# Altium PCB PCB3.PcbDoc
Units mm, origin at the board's own origin, x right, y up, seen from the top; angles counter-clockwise.
Board outline 98.04 x 87.25 mm, 2 copper layers (Top Layer, Bottom Layer); 45 components, 29 nets, 130 pads, 0 vias.
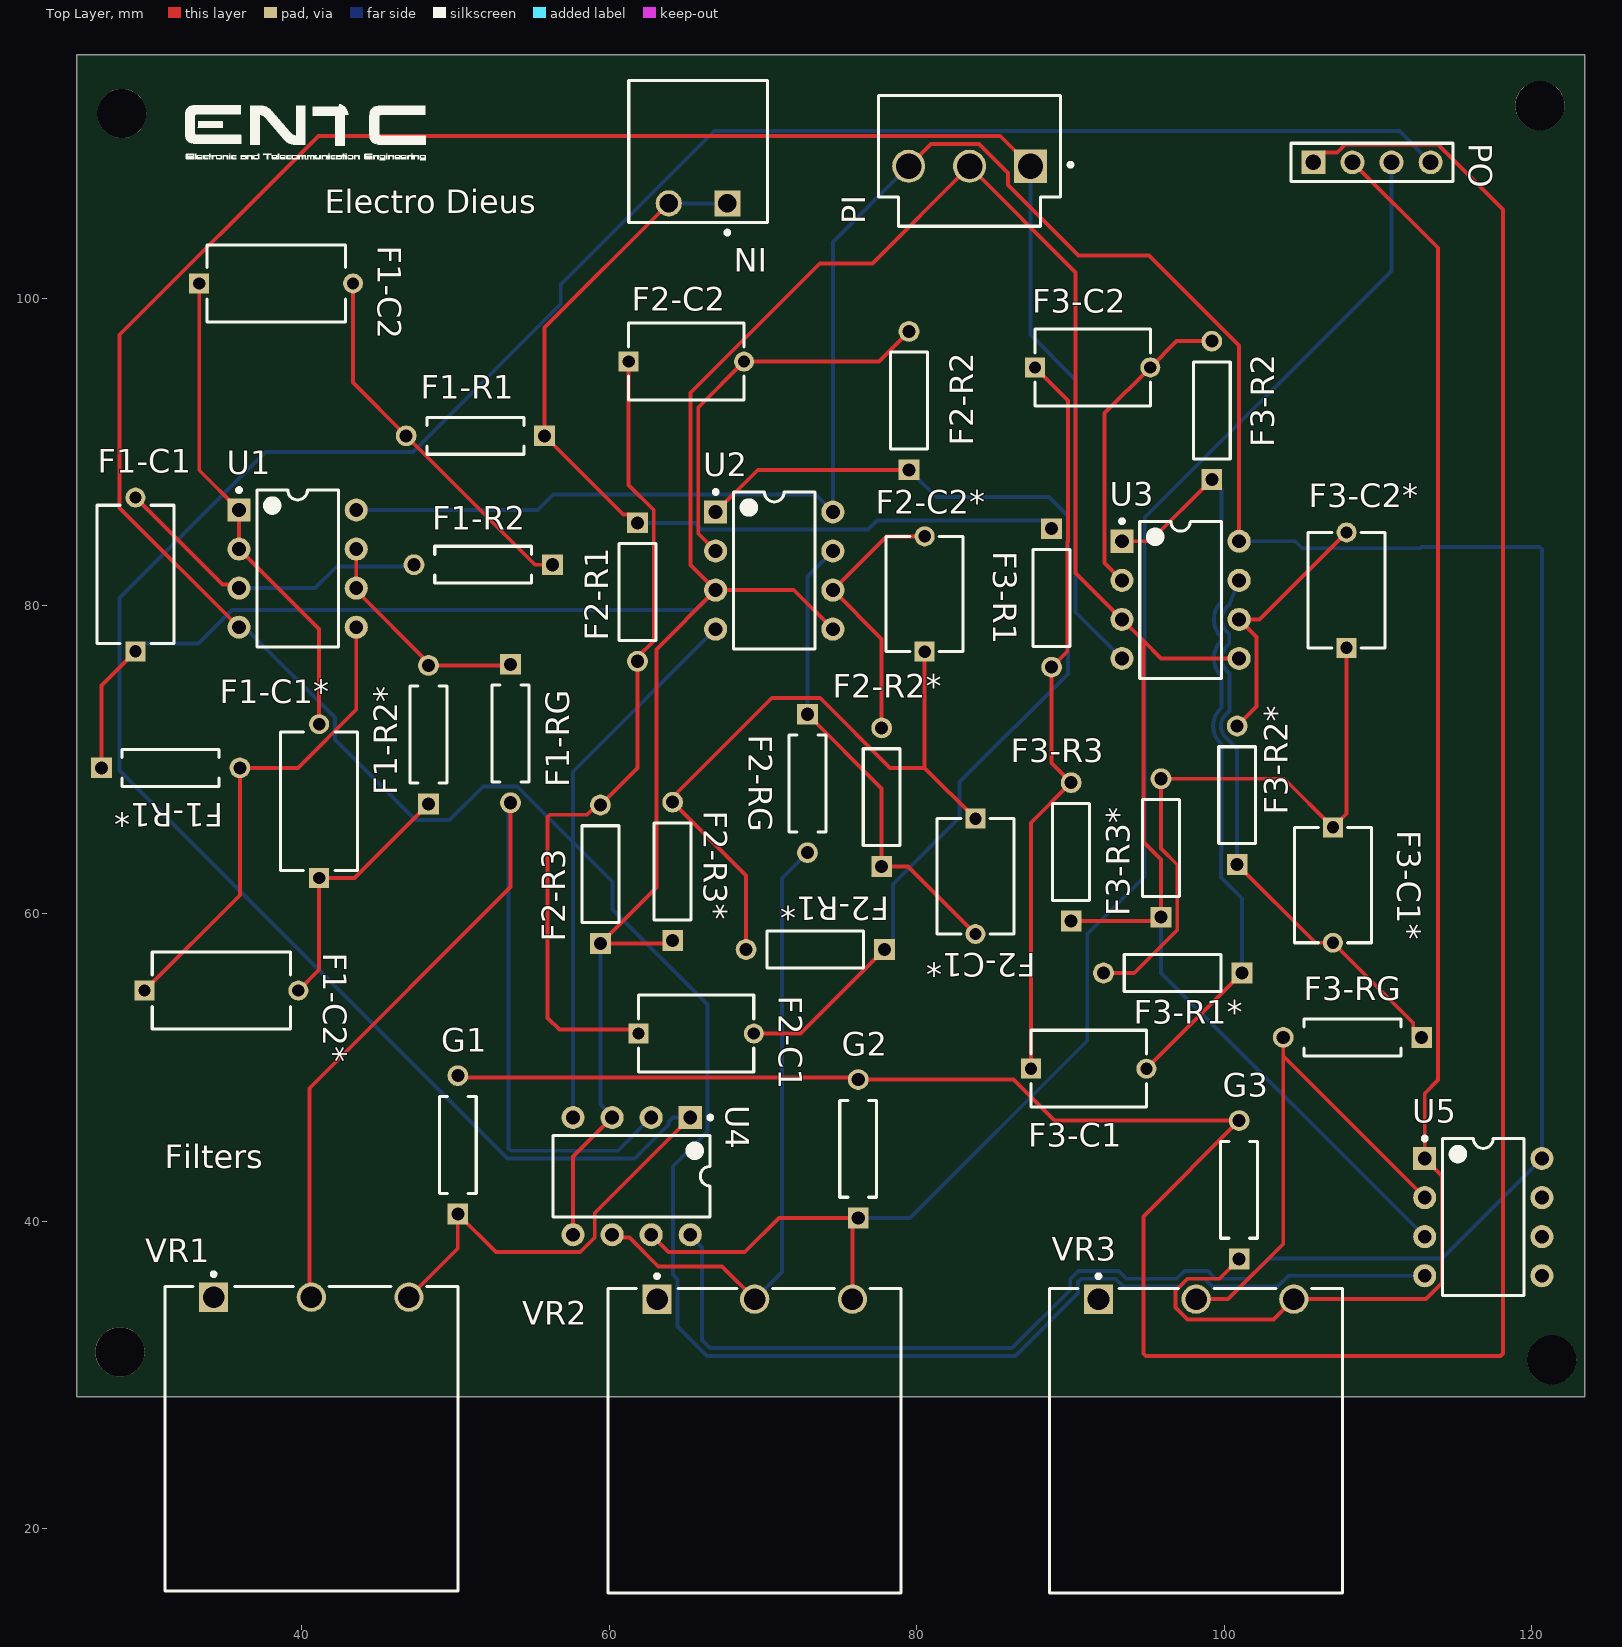
[diagram p0: Top Layer view]
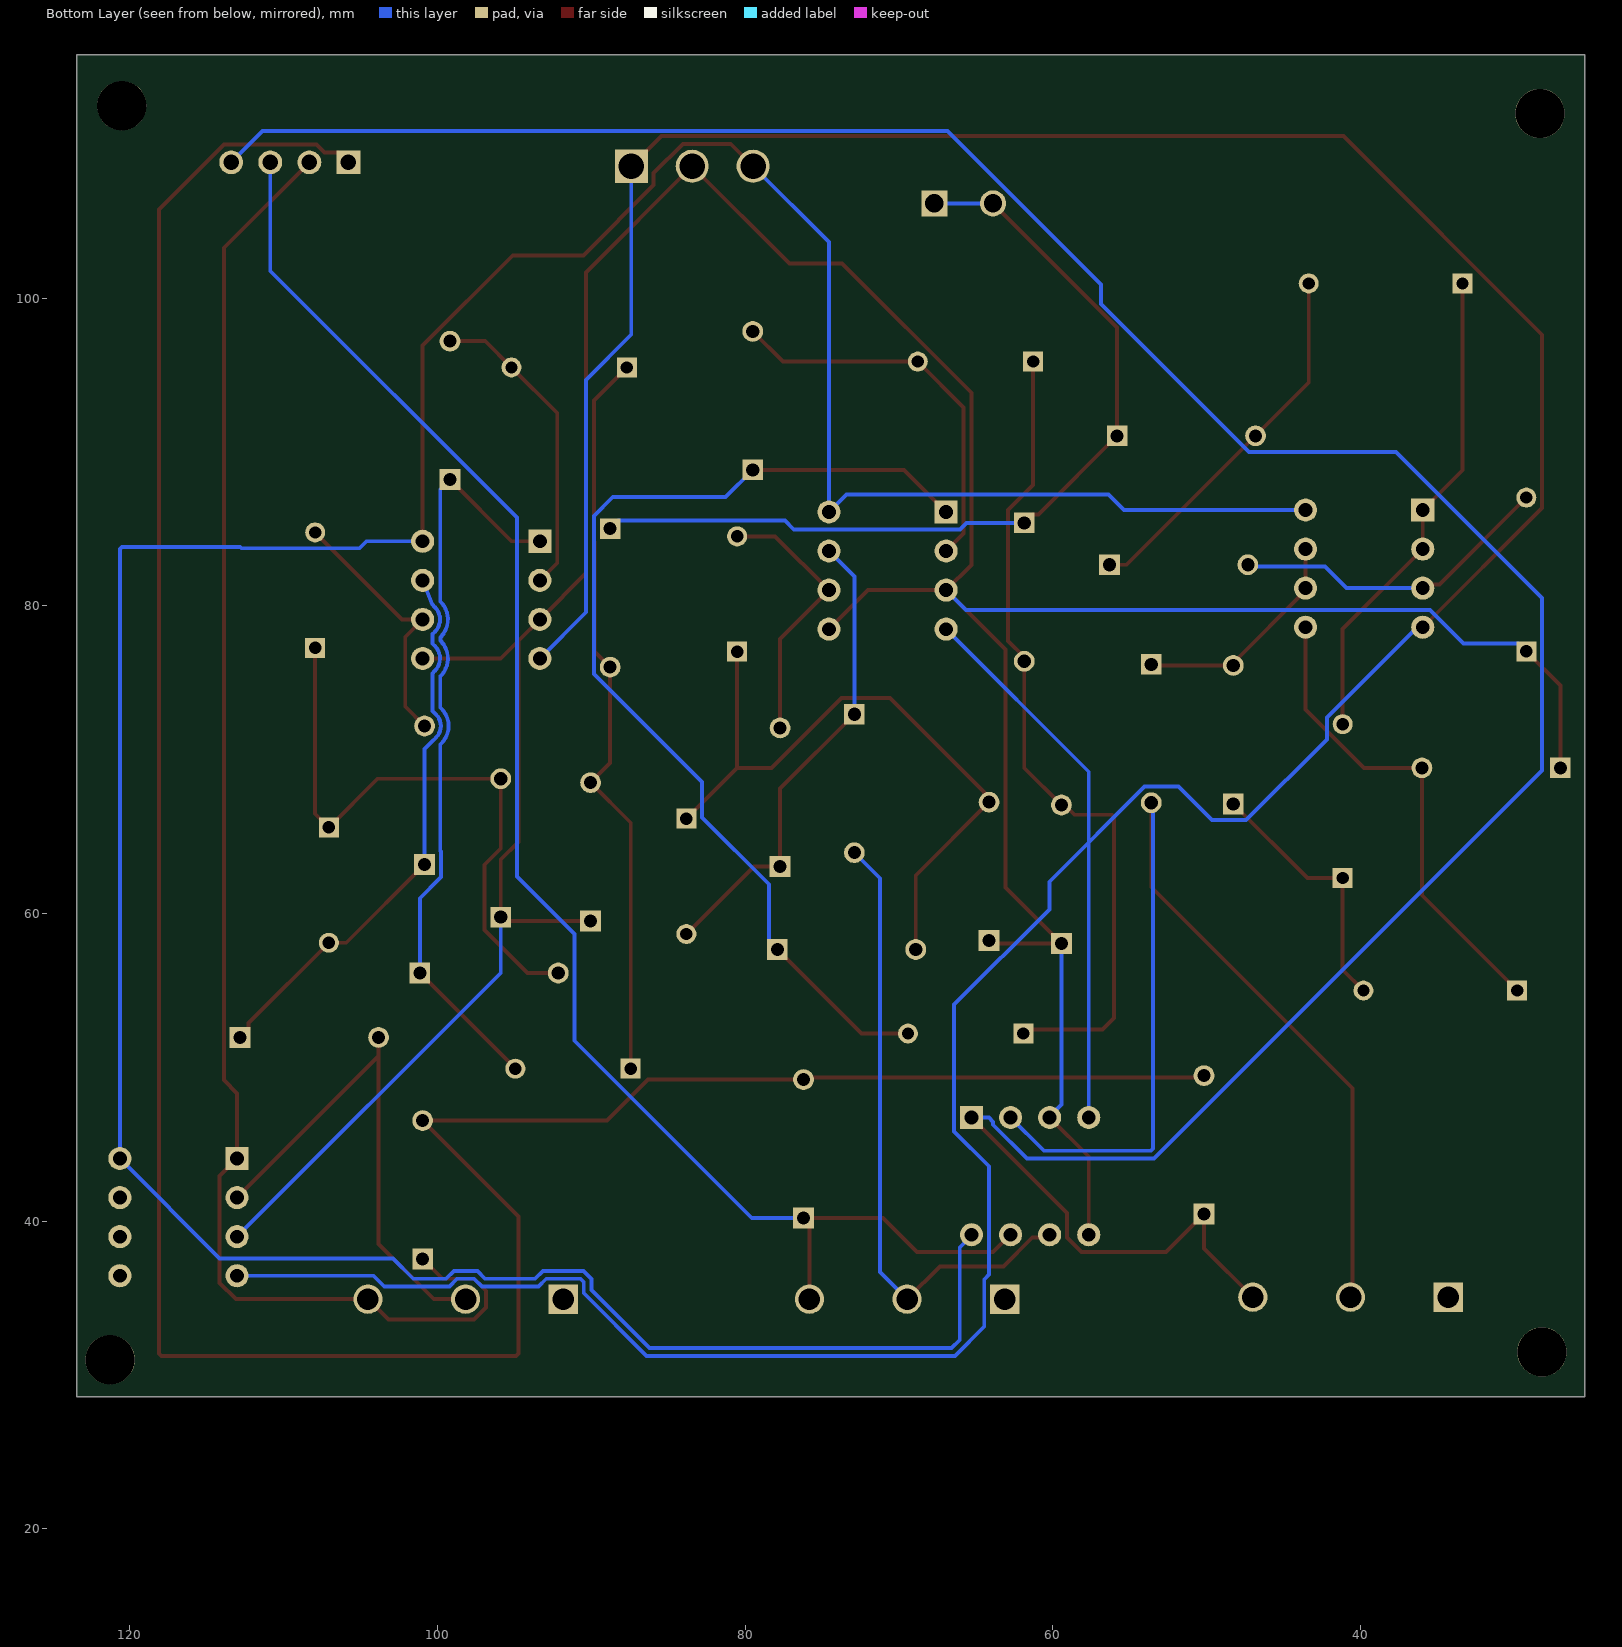
[diagram p1: Bottom Layer view, seen from below]

## Layer stack, top to bottom
Top Solder: solder mask 0.0102, Solder Resist, Dk 3.5
Top Layer: signal copper 0.0356
Dielectric 1: dielectric 0.32, FR-4, Dk 4.8
Bottom Layer: signal copper 0.0356
Bottom Solder: solder mask 0.0102, Solder Resist, Dk 3.5

## Board outline
25.4,28.575 123.444,28.575 123.444,115.824 25.4,115.824

## Design rules (kind name [scope] priority, off if disabled: settings)
Clearance [All] p1: gap=0.254 ignorepadtopadclearanceinfootprint=FALSE
HoleSize [All] p1: absolutevalues=TRUE maxlimit=4 minlimit=0.025 maxpercent=80.000 minpercent=20.000
PolygonConnect [All] p1: connectstyle=Relief reliefconductorwidth=0.254 reliefentries=4 polygonreliefangle="90 Angle" airgapwidth=0.254
RoutingVias [All] p1: holewidth=0.711 width=1.27 viastyle="Through Hole" minholewidth=0.711 minwidth=1.27 maxholewidth=0.711 maxwidth=1.27
SilkToSilkClearance [All] p1: silktosilkclearance=0.1
SilkToSolderMaskClearance [IsPad] p1: minsilkscreentomaskgap=0.1 clearancetoexposedcopper=TRUE
SolderMaskExpansion [All] p1: expansion=0.102 istentingtop=FALSE
SupplyNets "Schematic Supply Nets_2" [InNet('GND')] p1: voltage=0.000
SupplyNets "Schematic Supply Nets_1" [InNet('-12')] p2: voltage=0.000
SupplyNets "Schematic Supply Nets" [InNet('+12')] p3: voltage=0.000
Width [All] p1: maxlimit=0.254 minlimit=0.254 preferedwidth=0.254
27 further rules are at their usual default settings.

## Components (designator, comment, footprint, x,y, rotation, side; value= is the part's Value field where it differs from the comment)
F1-C1 "VY1102M35Y5UQ6TV0" FP-VY1102M35Y5UQ6TV0-MFG 29.21,82.042 r90 top
F1-C1* "VY1102M35Y5UQ6TV0" FP-VY1102M35Y5UQ6TV0-MFG 41.148,67.31 r90 top
F1-C2 "VY1102M35Y5UQ6TV0" FP-VY1102M35Y5UQ6TV0-MFG 38.354,100.965 r0 top
F1-C2* "VY1102M35Y5UQ6TV0" FP-VY1102M35Y5UQ6TV0-MFG 34.798,54.991 r0 top
F1-R1 "MFR-25FBF52-2K21" RESA60-630X240 51.308,91.059 r180 top value=2.21k
F1-R1* "MFR-25FBF52-2K21" RESA60-630X240 31.496,69.469 r0 top value=2.21k
F1-R2 "MFR-25FBF52-2K21" RESA60-630X240 51.816,82.677 r180 top value=2.21k (schematic designator F-R2)
F1-R2* "MFR-25FBF52-2K21" RESA60-630X240 48.26,71.628 r90 top value=2.21k
F1-RG "MFR-25FBF52-2K21" RESA60-630X240 53.594,71.7 r270 top value=2.21k
F2-C1 "VY2102M29Y5US6TV7" FP-VY2102M29Y5US6TV7-MFG 65.659,52.197 r0 top
F2-C1* "VY2102M29Y5US6TV7" FP-VY2102M29Y5US6TV7-MFG 83.82,62.417 r270 top
F2-C2 "VY2102M29Y5US6TV7" FP-VY2102M29Y5US6TV7-MFG 65.024,95.885 r0 top
F2-C2* "VY2102M29Y5US6TV7" FP-VY2102M29Y5US6TV7-MFG 80.518,80.772 r90 top
F2-R1 "MFR-25FBF52-2K21" RESA60-630X240 61.849,80.899 r270 top
F2-R1* "MFR-25FBF52-2K21" RESA60-630X240 73.406,57.658 r180 top
F2-R2 "MFR-25FBF5210K" RESA60-630X240 79.502,93.345 r90 top
F2-R2* "MFR-25FBF5210K" RESA60-630X240 77.724,67.564 r90 top
F2-R3 "MFR-25FBF5210K" RESA60-630X240 59.436,62.556 r90 top
F2-R3* "MFR-25FBF5210K" RESA60-630X240 64.135,62.738 r90 top
F2-RG "MFR-25FBF52-2K21" RESA60-630X240 72.898,68.453 r270 top value=2.21k
F3-C1 "VY2102M29Y5US6TV7" FP-VY2102M29Y5US6TV7-MFG 91.186,49.911 r0 top
F3-C1* "VY2102M29Y5US6TV7" FP-VY2102M29Y5US6TV7-MFG 107.061,61.849 r270 top
F3-C2 "VY2102M29Y5US6TV7" FP-VY2102M29Y5US6TV7-MFG 91.44,95.504 r0 top
F3-C2* "VY2102M29Y5US6TV7" FP-VY2102M29Y5US6TV7-MFG 107.95,81.026 r90 top
F3-R1 "MFR-25FBF52-2K21" RESA60-630X240 88.773,80.518 r270 top
F3-R1* "MFR-25FBF52-2K21" RESA60-630X240 96.647,56.134 r180 top
F3-R2 "MFR-25FBF5210K" RESA60-630X240 99.187,92.71 r90 top
F3-R2* "MFR-25FBF5210K" RESA60-630X240 100.838,67.691 r90 top
F3-R3 "MFR-25FBF5210K" RESA60-630X240 90.043,64.008 r90 top
F3-R3* "MFR-25FBF5210K" RESA60-630X240 95.885,64.262 r90 top
F3-RG "MFR-25FBF52-2K21" RESA60-630X240 108.331,51.943 r180 top value=2.21k
G1 "MFR-25FBF52-2K21" RESA60-630X240 50.165,44.958 r90 top value=2.21k
G2 "MFR-25FBF52-2K21" RESA60-630X240 76.2,44.704 r90 top value=2.21k
G3 "MFR-25FBF52-2K21" RESA60-630X240 100.965,42.037 r90 top value=2.21k
IN "1803277" PHOE-1803277_V 65.786,106.172 r180 top (schematic designator P1)
PI "B3P-VH(LF)(SN)" JST-B3P-VH(LF)(SN)-3_V 83.439,109.835 r180 top
PO "HMTSW-104-23-F-S-237" SMTC-HMTSW-104-23-X-S-237 105.791,108.839 r0 top
U1 "NE5532P" P0008A 39.751,82.423 r0 top
U2 "NE5532PE4" TI-P8 70.739,82.296 r0 top
U3 "NE5532PE4" TI-P8 97.155,80.391 r0 top
U4 "NE5532P" P0008A 61.468,42.926 r270 top
U5 "NE5532P" P0008A 116.84,40.259 r0 top
VR1 "3852A-282-103AL" BOUR-3852A-282-103AL-3_V 40.64,35.052 r0 top
VR2 "3852A-282-103AL" BOUR-3852A-282-103AL-3_V 69.469,34.925 r0 top
VR3 "3852A-282-103AL" BOUR-3852A-282-103AL-3_V 98.171,34.925 r0 top

## Footprints (in the part's own frame and the unit in brackets; to place one, negate y for a bottom-side part, rotate by r counter-clockwise, add the part's x,y. Pads: shape width x height; smd on the part's side, far side on the other; paste and mask are expansions set on the pad)
BOUR-3852A-282-103AL-3_V [mm] "TH, 3-Leads, Body 19.81x19.05mm, Pitch 6.35mm"
  rect 1.9x1.9 hole 1.4: 1(-6.35,0)
  round 1.9 hole 1.4: 2(0,0) 3(6.35,0)
  silkscreen extent -9.53,-19.11 9.53,1.62, body extent -9.52,-19.11 9.52,0.7, height 19.05
FP-VY1102M35Y5UQ6TV0-MFG [mm]
  rect 1.3x1.3 hole 0.8 paste-2539.97 mask+0: 1(-5,0)
  round 1.3 hole 0.8 paste-2539.97 mask+0: 2(5,0)
  silkscreen extent -4.5,-2.5 4.5,2.5, body extent -5.75,-2.6 5.75,2.6, height 0.25
FP-VY2102M29Y5US6TV7-MFG [mm]
  rect 1.3x1.3 hole 0.8 paste-2539.97 mask+0: 1(-3.75,0)
  round 1.3 hole 0.8 paste-2539.97 mask+0: 2(3.75,0)
  silkscreen extent -3.75,-2.5 3.75,2.5, body extent -4.5,-2.6 4.5,2.6, height 0.25
JST-B3P-VH(LF)(SN)-3_V [mm] "Connector, 3-Leads, Body 8.5x11.82mm, Pitch 3.96mm"
  rect 2.15x2.15 hole 1.65: 1(-3.96,1.25)
  round 2.15 hole 1.65: 2(0,1.25) 3(3.96,1.25)
  silkscreen extent -6.69,-3.35 5.91,5.15, body extent -5.91,-3.35 5.91,5.15, height 10.9
P0008A [mm] "DIP, 8-Leads, Body 10.15x6.6mm, Pitch 2.54mm"
  rect 1.5x1.5 hole 0.9: 1(-3.81,3.81)
  round 1.5 hole 0.9: 2(-3.81,1.27) 3(-3.81,-1.27) 4(-3.81,-3.81) 5(3.81,-3.81) 6(3.81,-1.27) 7(3.81,1.27) 8(3.81,3.81)
  silkscreen extent -3.93,-5.1 2.65,5.23, body extent -3.95,-5.07 3.95,5.07, height 5.08
PHOE-1803277_V [mm] "CONN, Body 9.2x9.01mm, Pitch 3.81mm"
  rect 1.7x1.7 hole 1.2: 1(-1.905,0)
  round 1.7 hole 1.2: 2(1.905,0)
  silkscreen extent -4.5,-8 4.5,2.02, body extent -4.51,-8 4.5,1.3, height 7.25
RESA60-630X240 [mm] "Axial Resistor, 2-Leads, Dia 2.4mm, Body Length 6.3mm"
  rect 1.35x1.35 hole 0.85: 1(-4.5,0)
  round 1.35 hole 0.85: 2(4.5,0)
  silkscreen extent -3.15,-1.2 3.15,1.2, body extent -4.77,-1.19 4.77,1.2, height 2.4
SMTC-HMTSW-104-23-X-S-237 [mm] "Terminal Strip, 1x2 Pins, Vertical, 2.54mm Pitch, Male"
  rect 1.55x1.55 hole 1.02: 1(0,0)
  round 1.55 hole 1.02: 2(2.54,0) 3(5.08,0) 4(7.62,0)
  silkscreen extent -1.46,-1.24 9.08,1.24, body extent -1.27,-1.27 8.89,1.27, height 8.56
TI-P8 [mm] "DIP, 8-Leads, Body 9.59x6.35mm, Pitch 2.54mm"
  rect 1.5x1.5 hole 0.9: 1(-3.81,3.81)
  round 1.5 hole 0.9: 2(-3.81,1.27) 3(-3.81,-1.27) 4(-3.81,-3.81) 5(3.81,-3.81) 6(3.81,-1.27) 7(3.81,1.27) 8(3.81,3.81)
  silkscreen extent -3.93,-5.1 2.65,5.23, body extent -3.95,-5.07 3.95,5.07, height 5.08

## Part data
F1-C1 F1-C1* F1-C2 F1-C2*: library part CMP-02417-000063-1, "CAP CER 1000PF 760VAC Y5U RADIAL", Capacitance=1nF, Case/Package=Radial, Dielectric=Y5U, Max Operating Temperature=125°C, Min Operating Temperature=-40°C, Package Quantity=500, Resistor Type=Ceramic, Tolerance=20%, Voltage=500V, Construction=RADIAL, Contact Plating=Tin, Depth=5mm, Diameter=9mm, Height=12mm, Height - Seated (Max)=0.512inch, Lead Diameter=0.6mm, Lead Pitch=10mm, Lead/Base Style=Kinked, Mount="Through Hole", Packaging="Tape and Reel", Radiation Hardening=No, RoHS Compliant=Yes, Series=VY1, Termination=Radial, Voltage Rating (AC)=500V, Voltage Rating (DC)=500V
F1-R1 F1-R1* F1-R2 F1-R2* F1-RG F2-RG F3-RG G1 G2 G3: library part CMP-009-00054-4, "Axial Resistor, 2.21 KOhm, +/- 1%, 0.25 W, -55 to 155 degC, 2-Pin THD, RoHS, Bulk", Case/Package=Axial, Manufacturer=Yageo, Max Operating Temperature=155°C, Min Operating Temperature=-55°C, Package Description="2-Pin Axial Lead, Dia 2.4 mm, Body Length 6.3 mm", Package Quantity=200, Package Reference=MFR-25, Power=250mW, Tolerance=1%, Voltage Rating=250V, Datasheet URL=http://www.yageo.com/documents/recent/Yageo%20LR_MFR_2013.pdf, Datasheet Version=Apr-13, Manufacturer URL=http://www.yageo.com/, Mounting Technology=TH, Packaging=Bulk, RoHS Compliant=True
F2-C1 F2-C1* F2-C2 F2-C2* F3-C1 F3-C1* F3-C2 F3-C2*: library part CMP-00030-42817980-1, "VY2102M29Y5US6TV7 Cap Ceramic Suppression X1/Y2 0.001uF 440VAC/300VAC Y5U 20% (7.5 X 5mm) Radial 7.5mm 125C T/R", Capacitance=1nF, Case/Package=Radial, Dielectric=Y5U, Max Operating Temperature=125°C, Min Operating Temperature=-40°C, Tolerance=20%, Voltage=300V, Voltage Rating=1kV, Composition=Ceramic, Depth=5mm, Diameter=7.5mm, Height=10.5mm, Height - Seated (Max)=11.5062mm, Lead Diameter=600µm, Lead Free="Lead Free", Lead Pitch=7.5mm, Lead/Base Style=Kinked, Material=Ceramic, Mount="Through Hole", NexarPartId=42817980, Packaging="Tape & Reel (TR)", Radiation Hardening=No, REACH SVHC=Unknown, RoHS=Compliant, Schedule B="8532230060, 8532230060", Termination=Radial, Voltage Rating (AC)=300V
F2-R1 F2-R1* F3-R1 F3-R1*: library part CMP-1659-00065-1, "Axial Resistor, 2.21 KOhm, +/- 1%, 0.25 W, -55 to 155 degC, 2-Pin THD, RoHS, Bulk", Case Code (Imperial)=0402, Case Code (Metric)=1005, Current Rating="300 mA", Max Operating Temperature="125 degC", Min Operating Temperature="-55 degC", Package Quantity=10000, Resistance="0.15 Ohm", Case\Package=0402, ComponentLink1Description="Manufacturer URL", ComponentLink1URL=http://www.yageo.com/, ComponentLink2Description=Datasheet, ComponentLink2URL=http://www.yageo.com/documents/recent/Yageo%20LR_MFR_2013.pdf, DatasheetVersion=Apr-13, Height="0.02 inch", Length="0.04 inch", Mount="Surface Mount", PackageDescription="2-Pin Axial Lead, Dia 2.4 mm, Body Length 6.3 mm", PackageReference=MFR-25, Packaging="Tape and Reel", Pins=2, Radiation Hardening=No, REACH SVHC="No SVHC", RoHSCompliant=true, Shielding=Unshielded, Width="0.02 inch"
F2-R2 F2-R2* F2-R3 F2-R3* F3-R2 F3-R2* F3-R3 F3-R3*: library part CMP-1659-00074-2, "Axial Resistor, 10 KOhm, +/- 1%, 0.25 W, -55 to 155 degC, 2-Pin THD, RoHS, Bulk", Case\/Package=Axial, Manufacturer=Yageo, Max Operating Temperature=155degC, Max Power Dissipation=250mW, Min Operating Temperature=-55degC, Package Description="2-Pin Axial Lead, Dia 2.4 mm, Body Length 6.3 mm", Package Quantity=200, Package Reference=MFR-25, Resistance=10KOhm, Temperature Coefficient=100ppm\/degreesC, Tolerance=1%, Voltage Rating=250V, Voltage Rating (DC)=200V, Composition=MetalFilm, Datasheet URL=http://www.yageo.com/documents/recent/Yageo%20LR_MFR_2013.pdf, Datasheet Version=04/2013, Lead Free=LeadFree, Length=0.248inch, Manufacturer URL=http://www.yageo.com/, Military Standard=Not, Mount=ThroughHole, Mounting Technology=ThroughHole, Number of Terminations=2, Packaging=Bulk, Power Rating=250mW, RoHSCompliant=True, Termination=Axial
IN: library part CMP-002-00014-2, "Male Header, Pitch 3.81 mm, 1 x 2 Position, Height 7.25 mm, Tail Length 3.4 mm, RoHS, Bulk", Colour=Green, Current Rating=8A, Manufacturer="Phoenix Contact", Package Description="Male Header, Pitch 3.81 mm, 1 x 2 Position, Height 7.25 mm, Tail Length 3.4 mm", Package Quantity=50, Voltage Rating=160V, Case/Package=1803277, Connector Type=Header, Contact Plating=Tin, Datasheet URL=https://datasheet.ciiva.com/16096/1803277-16096845.pdf, Datasheet Version=Feb-14, Diameter=7.25mm, Gender=Male, Lead Pitch=0.15inch, Manufacturer URL=http://www.phoenixcontact.com/, Max Current Rating=8A, Mounting Technology=TH, Package Reference=1803277, Packaging=Bulk, Pins=2, RoHS Compliant=True, Rows=1
PI: library part CMP-002-00026-2, "Male Header, Pitch 3.96 mm, 1 x 3 Position, Height 10.9 mm, Tail Length 3.7 mm, -25 to 85 degC, RoHS, Bulk", Manufacturer=JST, Max Operating Temperature=85°C, Min Operating Temperature=-25°C, Package Description="Male Header, Pitch 3.96 mm, 1 x 3 Position, Height 10.9 mm, Tail Length 3.7 mm", Case/Package=B3P-VH(LF)(SN), Connector Type=Header, Datasheet URL=http://www.jst-mfg.com/product/pdf/eng/eVH.pdf, Datasheet Version=May-16, Gender=Male, Manufacturer URL=http://www.jst.com/home2.html, Mounting Technology=TH, Package Reference=B3P-VH(LF)(SN), RoHS Compliant=Unknown
PO: library part CMP-1024-00021-1, "Modified .025\" SQ Post Header, Through-hole, Vertical, -55 to 125 degC, 2.54 mm Pitch, 4-Pin, Male, RoHS", Manufacturer=Samtec, Temperature Range="-55 to 125 degC", ComponentLink1Description="Manufacturer URL", ComponentLink1URL=http://www.samtec.com, ComponentLink2Description=Datasheet, ComponentLink2URL=http://www.samtec.com/documents/webfiles/pdf/HMTSW.PDF, ComponentLink3Description="Package Specification", ComponentLink3URL=http://www.samtec.com/documents/webfiles/cpdf/HMTSW-XXX-XX-X-X-XXXX-XX-XX-MKT1.pdf, DatasheetVersion=F-214, Mounting Technology=Through-hole, Orientation=Vertical, PackageDescription="Assembly .025 [.64] SQ. Post Hi-Temp Terminal Strip", PackageReference=HMTSW-104-23-X-S-237, PackageVersion="AL, 3/1987", PartNumber=HMTSW-104-23-F-S-237, Pitch="2.54 mm", RoHS=True
U1 U4 U5: library part CMP-0017-00910-2, "Dual Low-Noise High-Speed Audio Operational Amplifier, 10 to 30 V, 0 to 70 degC, 8-pin DIP (P8), Pb-Free (RoHS)", Manufacturer="Texas Instruments", Total Supply Voltage(Max)(+5V is 5, +/-5V is 10)=30, Total Supply Voltage(Min)(+5V is 5, +/-5V is 10)=10, CMRR(Min)(dB)=70, Code_JEDEC=MS-001, ComponentLink1Description="Manufacturer URL", ComponentLink1URL=http://www.ti.com/, ComponentLink2Description=Datasheet, ComponentLink2URL=http://www.ti.com/lit/ds/symlink/ne5532.pdf, ComponentLink3Description="Package Specification", ComponentLink3URL=http://www.ti.com/litv/pdf/mpdi001b, DatasheetVersion=SLOS075I, Eco-Plan="Pb-Free (RoHS)", GBW(Typ)(MHz)=10, IIB(Max)(pA)=800000, Iq per channel(Max)(mA)=4, Mounting Technology="Through Hole", Number of Channels=2, PackageDescription="8-Pin Plastic In-Line, Body 9.59 x 6.35 mm, Pitch 2.54 mm", PackageReference=P0008A, PackageVersion="4040082/E, 04/2010", PartNumber=NE5532P, Slew Rate(Typ)(V/us)=9, Sub Family="General Purpose Amplifier, High Supply Voltage Amplifier (>=30V), Low Noise Amp (<=10nV/rtHz)", Vio (25C)(Max)(mV)=4, Vn at 1kHz(Typ)(nV/rtHz)=5
U2 U3: library part CMP-0017-00902-1, "Dual Low-Noise High-Speed Audio Operational Amplifier, 10 to 30 V, 0 to 70 degC, 8-pin DIP (P8), Pb-Free (RoHS)", Manufacturer="Texas Instruments", Total Supply Voltage(Max)(+5V is 5, +/-5V is 10)=30, Total Supply Voltage(Min)(+5V is 5, +/-5V is 10)=10, CMRR(Min)(dB)=70, Code_JEDEC=MS-001, ComponentLink1Description="Manufacturer URL", ComponentLink1URL=http://www.ti.com/, ComponentLink2Description=Datasheet, ComponentLink2URL=http://www.ti.com/lit/ds/symlink/ne5532.pdf, ComponentLink3Description="Package Specification", ComponentLink3URL=http://www.ti.com/litv/pdf/mpdi001b, DatasheetVersion=SLOS075I, Eco-Plan="Pb-Free (RoHS)", GBW(Typ)(MHz)=10, IIB(Max)(pA)=800000, Iq per channel(Max)(mA)=4, Mounting Technology="Through Hole", Number of Channels=2, PackageDescription="8-Pin Plastic In-Line, Body 9.59 x 6.35 mm, Pitch 2.54 mm", PackageReference=P8, PackageVersion="4040082/E, 04/2010", PartNumber=NE5532PE4, Slew Rate(Typ)(V/us)=9, Sub Family="General Purpose Amplifier, High Supply Voltage Amplifier (>=30V), Low Noise Amp (<=10nV/rtHz)", Vio (25C)(Max)(mV)=4, Vn at 1kHz(Typ)(nV/rtHz)=5
VR1 VR2 VR3: library part CMP-2000-05079-1, "Diameter Panel Control, 10 KOhm, +/- 10%, 2 W, -1 to 125 degC, 3-Pin THD, RoHS, Bulk", Manufacturer=Bourns, Power (Watts)=2W, Resistance (Ohms)=10k, Resistive Material=Cermet, Standard Package=45, Temperature Coefficient=±150ppm/degC, Tolerance=±10%, Actuator Diameter="0.250\"(6.35mm)", Actuator Length="0.875\"(22.23mm)", Actuator Type=Slotted, Associated Product="36-8560-ND / -KNOBINSTRUMW/DIALRND.9\"DIA / 36-8555-ND / -KNOBINSTRUMSKIRTEDRND.7\"DIA / 36-8556-ND / -KNOBINSTRUMSKIRTEDRND.9\"DIA / 36-8565-ND / -KNOBINSTRUMDBLBARRND.7\"DIA / 36-8566-ND / -KNOBINSTRUMDBLBARRND.9\"DIA / 36-8568-ND / -KNOBINSTRUMSGLBARRND.7\"DIA / 36-8569-ND / -KNOBINSTRUMSGLBARRND.9\"DIA / 36-8559-ND / -KNOBINSTRUMW/DIALRND.7\"DIA / 226-1006-ND / -KNOBBLKGLOSS.75\"DIA.250\"SHAFT / 226-1007-ND / -KNOBBLKGLOSS.925\"DIA.250\"SHAFT / 226-1011-ND / -KNOBBLKGLOS", Built in Switch=None, Bushing Thread=3/8-32, Catalog Drawings="3852SeriesSide1 /  / 3852SeriesSide2", Category=Potentiometers,VariableResistors, Datasheet URL=https://datasheet.ciiva.com/11831/0900766b80f93b4b-11831016.pdf, Datasheet Version=Sep-14, Family=RotaryPotentiometers,Rheostats, Manufacturer URL=http://www.bourns.com/, Mounting Type=PanelMount, Number of Gangs=1, Number of Turns=1, Online Catalog=3852and3856Series, Other Names=3852A282103AL, Packaging=Bulk, PCN Design/Specification=PBTResinJun/2011, PCN Other=MultipleChanges01/Dec/2012, RoHS Information=3852A-LMaterialDeclaration, Rotation=280deg, Series=3852, Taper=Linear, Termination Style=SolderLug

## Free pads (board coordinates)
  round 3.2 hole 3.2 unplated: 21(120.523,112.522) 22(121.285,30.988) 23(28.194,31.496) 24(28.321,112.014)

## Nets (pads, with @x,y where several pads share a name; then routed paths per layer and width w, separated by ;. In a path a pad name is that pad's centre, name@x,y a point inside that pad or via, vN(x,y) a via of type N, cw(c..) or ccw(c..) an arc to the next point about the centre after c; other vN are vias at no path point)
+12: PI.3 U1.8 U2.8 U3.8 U4.8 U5.8 | length 225
  Top Layer w0.254: PI.3 80.935,110.041 84.042,110.041 85.943,108.14 85.943,107.352 90.513,102.782 95.108,102.782 100.965,96.925 U3.8
  Bottom Layer w0.254: U1.8 55.365,86.233 56.369,87.237 73.418,87.237 U2.8 74.549,103.655 PI.3 ; U4.8 65.278,39.047 66.043,38.282 66.043,32.277 66.57,31.75 86.207,31.75 89.982,35.525 89.982,36.243 90.503,36.764 93.139,36.764 93.647,36.256 96.901,36.256 97.409,36.764 98.933,36.764 99.441,36.256 101.573,36.256 102.897,37.58 114.161,37.58 U5.8 120.65,83.693 120.501,83.842 112.833,83.842 112.736,83.745 105.068,83.745 104.612,84.201 U3.8
-12: PI.1 U1.4 U2.4 U3.4 U4.4 U5.4 | length 276.8
  Top Layer w0.254: U1.4 28.179,86.375 28.179,97.629 41.099,110.549 85.435,110.549 PI.1
  Bottom Layer w0.254: U1.4 36.179,78.375 36.541,78.375 42.179,72.737 42.179,71.32 47.427,66.072 49.637,66.072 51.821,68.256 54.031,68.256 60.22,62.067 60.22,60.264 66.409,54.075 66.409,45.828 64.147,43.566 64.147,36.519 64.45,36.216 64.45,33.151 66.359,31.242 86.418,31.242 90.49,35.314 90.49,36.033 90.713,36.256 92.929,36.256 93.437,35.748 97.112,35.748 97.62,36.256 98.722,36.256 99.23,35.748 103.462,35.748 104.163,36.449 U5.4 ; U4.4 57.658,69.215 U2.4 ; PI.1 87.399,97.634 90.337,94.696 90.337,79.589 U3.4
GND: F1-C1.1 F1-R1*.1 F2-R3*.1 F2-R3.1 F3-R3*.1 F3-R3.1 PI.2 U2.3 U2.5 U3.3 U3.5 U4.3 U4.5 U5.3 | length 240.2
  Top Layer w0.254: F1-R1*.1 26.996,74.828 F1-C1.1 ; U4.5 57.658,44.196 U4.3 ; F2-R3*.1 63.953,58.056 F2-R3.1 63.079,61.699 63.079,77.176 U2.3 ; U2.5 72.009,81.026 U2.3 ; F3-R3.1 95.631,59.508 F3-R3*.1 95.885,63.507 94.734,64.658 94.734,77.732 ; U3.5 95.885,76.581 94.734,77.732 ; U2.3 65.29,82.665 65.29,93.859 73.698,102.267 77.121,102.267 PI.2 90.337,101.687 90.337,82.129 U3.3 94.734,77.732
  Bottom Layer w0.254: F1-C1.1@29.21,76.835 F1-C1.1 29.733,77.565 33.294,77.565 35.473,79.744 65.647,79.744 U2.3 ; F2-R3.1 59.436,47.573 60.198,46.811 U4.3 ; F3-R3*.1 95.885,56.134 U5.3
NetF1-C1*_1: F1-C1*.1 F1-C2*.2 F1-R2*.1 | length 17
  Top Layer w0.254: F1-C2*.2 41.148,56.341 F1-C1*.1 43.442,62.31 F1-R2*.1
NetF1-C1*_2: F1-C1*.2 F1-C2.1 U1.1 U1.2 | length 31.9
  Top Layer w0.254: F1-C2.1 33.354,88.82 U1.1 U1.2 41.148,78.486 F1-C1*.2
NetF1-C1_2: F1-C1.2 F1-R2.2 U1.3 | length 21.2
  Top Layer w0.254: F1-C1.2 34.861,81.391 35.703,81.391 U1.3
  Bottom Layer w0.254: U1.3 40.887,81.153 42.296,82.562 47.201,82.562 F1-R2.2
NetF1-C2*_1: F1-C2*.1 F1-R1*.2 U1.5 | length 31.5
  Top Layer w0.254: F1-C2*.1 35.996,61.189 F1-R1*.2 39.765,69.469 43.561,73.265 U1.5
NetF1-C2_2: F1-C2.2 F1-R1.2 F1-R2.1 | length 24.3
  Top Layer w0.254: F1-C2.2 43.354,94.513 F1-R1.2 55.19,82.677 F1-R2.1
NetF1-R1_1: F1-R1.1 F2-R1.1 F3-R1.1 IN.1 IN.2 | length 58.2
  Top Layer w0.254: F2-R1.1 61.301,85.947 60.92,85.947 F1-R1.1 55.808,98.099 IN.2
  Bottom Layer w0.254: F2-R1.1 65.597,85.399 66.021,84.975 76.834,84.975 77.412,85.553 88.238,85.553 F3-R1.1 ; IN.2 IN.1
NetF1-R2*_2: F1-R2*.2 F1-RG.1 U1.6 U1.7 | length 14.9
  Top Layer w0.254: U1.7 U1.6 43.561,80.99 48.26,76.291 F1-R2*.2 53.522,76.128 F1-RG.1
NetF1-RG_2: F1-RG.2 U4.2 VR1.2 | length 70.4
  Top Layer w0.254: VR1.2 40.513,35.179 40.513,48.641 53.594,61.722 F1-RG.2
  Bottom Layer w0.254: F1-RG.2 53.467,67.073 53.467,44.726 53.616,44.577 60.579,44.577 U4.2
NetF2-C1*_1: F2-C1*.1 F2-C2*.1 F2-R1*.2 F2-R3*.2 | length 45
  Top Layer w0.254: F2-R1*.2 68.906,62.467 F2-R3*.2 64.135,67.535 64.465,67.864 64.465,67.894 70.58,74.009 73.731,74.009 78.271,69.469 80.518,69.469 ; F2-C2*.1 80.518,69.469 ; F2-C1*.1 80.518,69.469
NetF2-C1*_2: F2-C1*.2 F2-R2*.1 F2-RG.1 U2.7 | length 31.1
  Top Layer w0.254: F2-RG.1 77.724,68.127 F2-R2*.1 79.423,63.064 F2-C1*.2
  Bottom Layer w0.254: F2-RG.1 72.898,81.915 U2.7
NetF2-C1_1: F2-C1.1 F2-C2.1 F2-R1.2 F2-R3.2 | length 54.1
  Top Layer w0.254: F2-C2.1 61.274,87.863 62.905,86.232 62.905,77.72 61.849,76.664 F2-R1.2 61.849,69.469 F2-R3.2 59.213,67.056 58.578,66.421 56.156,66.421 56.007,66.272 56.007,53.213 56.769,52.451 61.655,52.451 F2-C1.1
NetF2-C1_2: F2-C1.2 F2-R1*.1 F2-R2.1 U2.1 | length 69.2
  Top Layer w0.254: U2.1 69.668,88.845 F2-R2.1 ; F2-C1.2 72.445,52.197 F2-R1*.1
  Bottom Layer w0.254: F2-R1*.1 78.454,58.206 78.454,61.905 82.789,66.24 82.789,68.541 89.829,75.581 89.829,85.851 88.606,87.074 81.273,87.074 F2-R2.1
NetF2-C2*_2: F2-C2*.2 F2-R2*.2 U2.6 | length 17.7
  Top Layer w0.254: F2-R2*.2 77.724,77.851 U2.6 78.045,84.522 F2-C2*.2
NetF2-C2_2: F2-C2.2 F2-R2.2 U2.2 | length 25.6
  Top Layer w0.254: U2.2 65.798,84.697 65.798,92.909 F2-C2.2 77.542,95.885 F2-R2.2
NetF2-RG_2: F2-RG.2 U4.6 VR2.2 | length 41.5
  Top Layer w0.254: U4.6 60.388,38.926 61.329,38.926 63.196,37.059 67.335,37.059 VR2.2
  Bottom Layer w0.254: VR2.2 71.236,36.692 71.236,62.291 F2-RG.2
NetF3-C1*_1: F3-C1*.1 F3-C2*.1 F3-R1*.2 F3-R3*.2 | length 40.8
  Top Layer w0.254: F3-R1*.2 94.146,56.134 96.941,58.929 96.941,63.169 95.885,64.225 F3-R3*.2 103.898,68.762 F3-C1*.1 107.95,66.488 F3-C2*.1
NetF3-C1*_2: F3-C1*.2 F3-R2*.1 F3-RG.1 U3.7 | length 36.8
  Top Layer w0.254: F3-R2*.1 105.93,58.099 F3-C1*.2 112.283,52.877 112.283,52.491 F3-RG.1 ; U3.7@100.965,81.534 U3.7
  Bottom Layer w0.254: F3-R2*.1 100.838,70.698 100.33,71.206 100.106,71.43 ccw(c99.747,71.071) 100.103,71.432 cw(c100.838,72.191) 100.103,72.95 100.33,73.176 100.33,75.617 100.182,75.765 ccw(c99.822,75.406) 100.178,75.768 cw(c100.965,76.581) 100.166,77.381 100.323,77.538 100.323,78.163 100.178,78.308 cw(c100.965,79.121) 100.179,79.934 ccw(c99.822,80.296) 100.181,79.936 100.33,80.085 U3.7
NetF3-C1_1: F3-C1.1 F3-C2.1 F3-R1.2 F3-R3.2 | length 48.5
  Top Layer w0.254: F3-C1.1 87.436,65.901 F3-R3.2 88.773,69.778 F3-R1.2 89.789,77.034 89.789,84.145 89.829,84.185 89.829,93.365 F3-C2.1
NetF3-C1_2: F3-C1.2 F3-R1*.1 F3-R2.1 U3.1 | length 50.1
  Top Layer w0.254: U3.1 95.178,84.201 F3-R2.1 ; F3-C1.2 94.936,49.923 F3-R1*.1
  Bottom Layer w0.254: F3-R2.1 99.822,87.575 99.822,80.296 ccw(c100.965,79.121) 99.75,78.021 cw(c99.561,77.851) 99.75,77.681 ccw(c100.965,76.581) 99.822,75.406 99.822,73.387 99.748,73.312 cw(c99.568,73.492) 99.747,73.311 ccw(c100.838,72.191) 99.747,71.071 ; 99.748,71.07 99.822,70.995 99.822,64.064 99.782,64.024 99.782,62.358 99.856,62.284 101.147,60.993 F3-R1*.1
NetF3-C2*_2: F3-C2*.2 F3-R2*.2 U3.6 | length 17.2
  Top Layer w0.254: F3-R2*.2 102.096,73.449 102.096,77.99 U3.6 102.295,79.121 F3-C2*.2
NetF3-C2_2: F3-C2.2 F3-R2.2 U3.2 | length 20.2
  Top Layer w0.254: U3.2 92.214,82.792 92.214,92.528 F3-C2.2 96.896,97.21 F3-R2.2
NetF3-RG_2: F3-RG.2 U5.2 VR3.2 | length 34.8
  Top Layer w0.254: VR3.2 100.242,34.925 103.831,38.514 F3-RG.2 103.831,50.728 U5.2
NetG1_1: G1.1 PO.4 U4.1 VR1.3 | length 186.8
  Top Layer w0.254: VR1.3 50.165,38.227 G1.1 52.638,37.985 58.126,37.985 59.067,38.926 59.067,40.525 U4.1
  Bottom Layer w0.254: U4.1 64.147,46.736 63.869,46.458 63.869,46.268 61.67,44.069 53.405,44.069 28.179,69.295 28.179,80.51 37.672,90.003 47.245,90.003 56.858,99.616 56.858,100.89 66.839,110.871 111.379,110.871 PO.4
NetG1_2: G1.2 G2.2 G3.2 PO.1 | length 182.4
  Top Layer w0.254: G1.2 50.165,49.657 50.491,49.331 76.073,49.331 G2.2 86.304,49.204 88.971,46.537 G3.2 94.742,40.314 94.742,31.391 94.891,31.242 117.961,31.242 118.11,31.391 118.11,105.775 113.89,109.995 107.852,109.995 107.344,109.487 106.439,109.487 PO.1
NetG2_1: G2.1 PO.3 U4.7 VR2.3 | length 105.3
  Top Layer w0.254: U4.7 63.869,37.985 68.82,37.985 71.039,40.204 G2.1 75.819,39.823 VR2.3
  Bottom Layer w0.254: G2.1 79.568,40.204 91.091,51.727 91.091,58.667 94.829,62.405 94.829,85.741 110.871,101.783 PO.3
NetG3_1: G3.1 PO.2 U5.1 VR3.3 | length 100.7
  Top Layer w0.254: G3.1 99.684,36.256 97.62,36.256 96.84,35.476 96.84,34.374 97.62,33.594 103.19,33.594 VR3.3 113.105,34.925 114.161,35.981 114.161,42.938 U5.1 113.03,48.305 113.887,49.162 113.887,103.283 PO.2
pads on no net: U5.5 U5.6 U5.7 VR1.1 VR2.1 VR3.1

## Silkscreen, mask and mechanical layers (free items; w line width, h text height)
Top Overlay:
  drawing of 51 lines, arcs and shapes, not listed
  text "Electro Dieus" at 41.529,105.537 h1.52
  text "Filters" at 31.115,43.434 h1.52